# Altium PCB LUX_35.PcbDoc
Units mm, origin at the board's own origin, x right, y up, seen from the top; angles counter-clockwise.
Board outline 72.59 x 68.02 mm, 2 copper layers (Top, Bottom), stack 0.323 mm thick; 62 components, 57 nets, 203 pads, 77 vias.
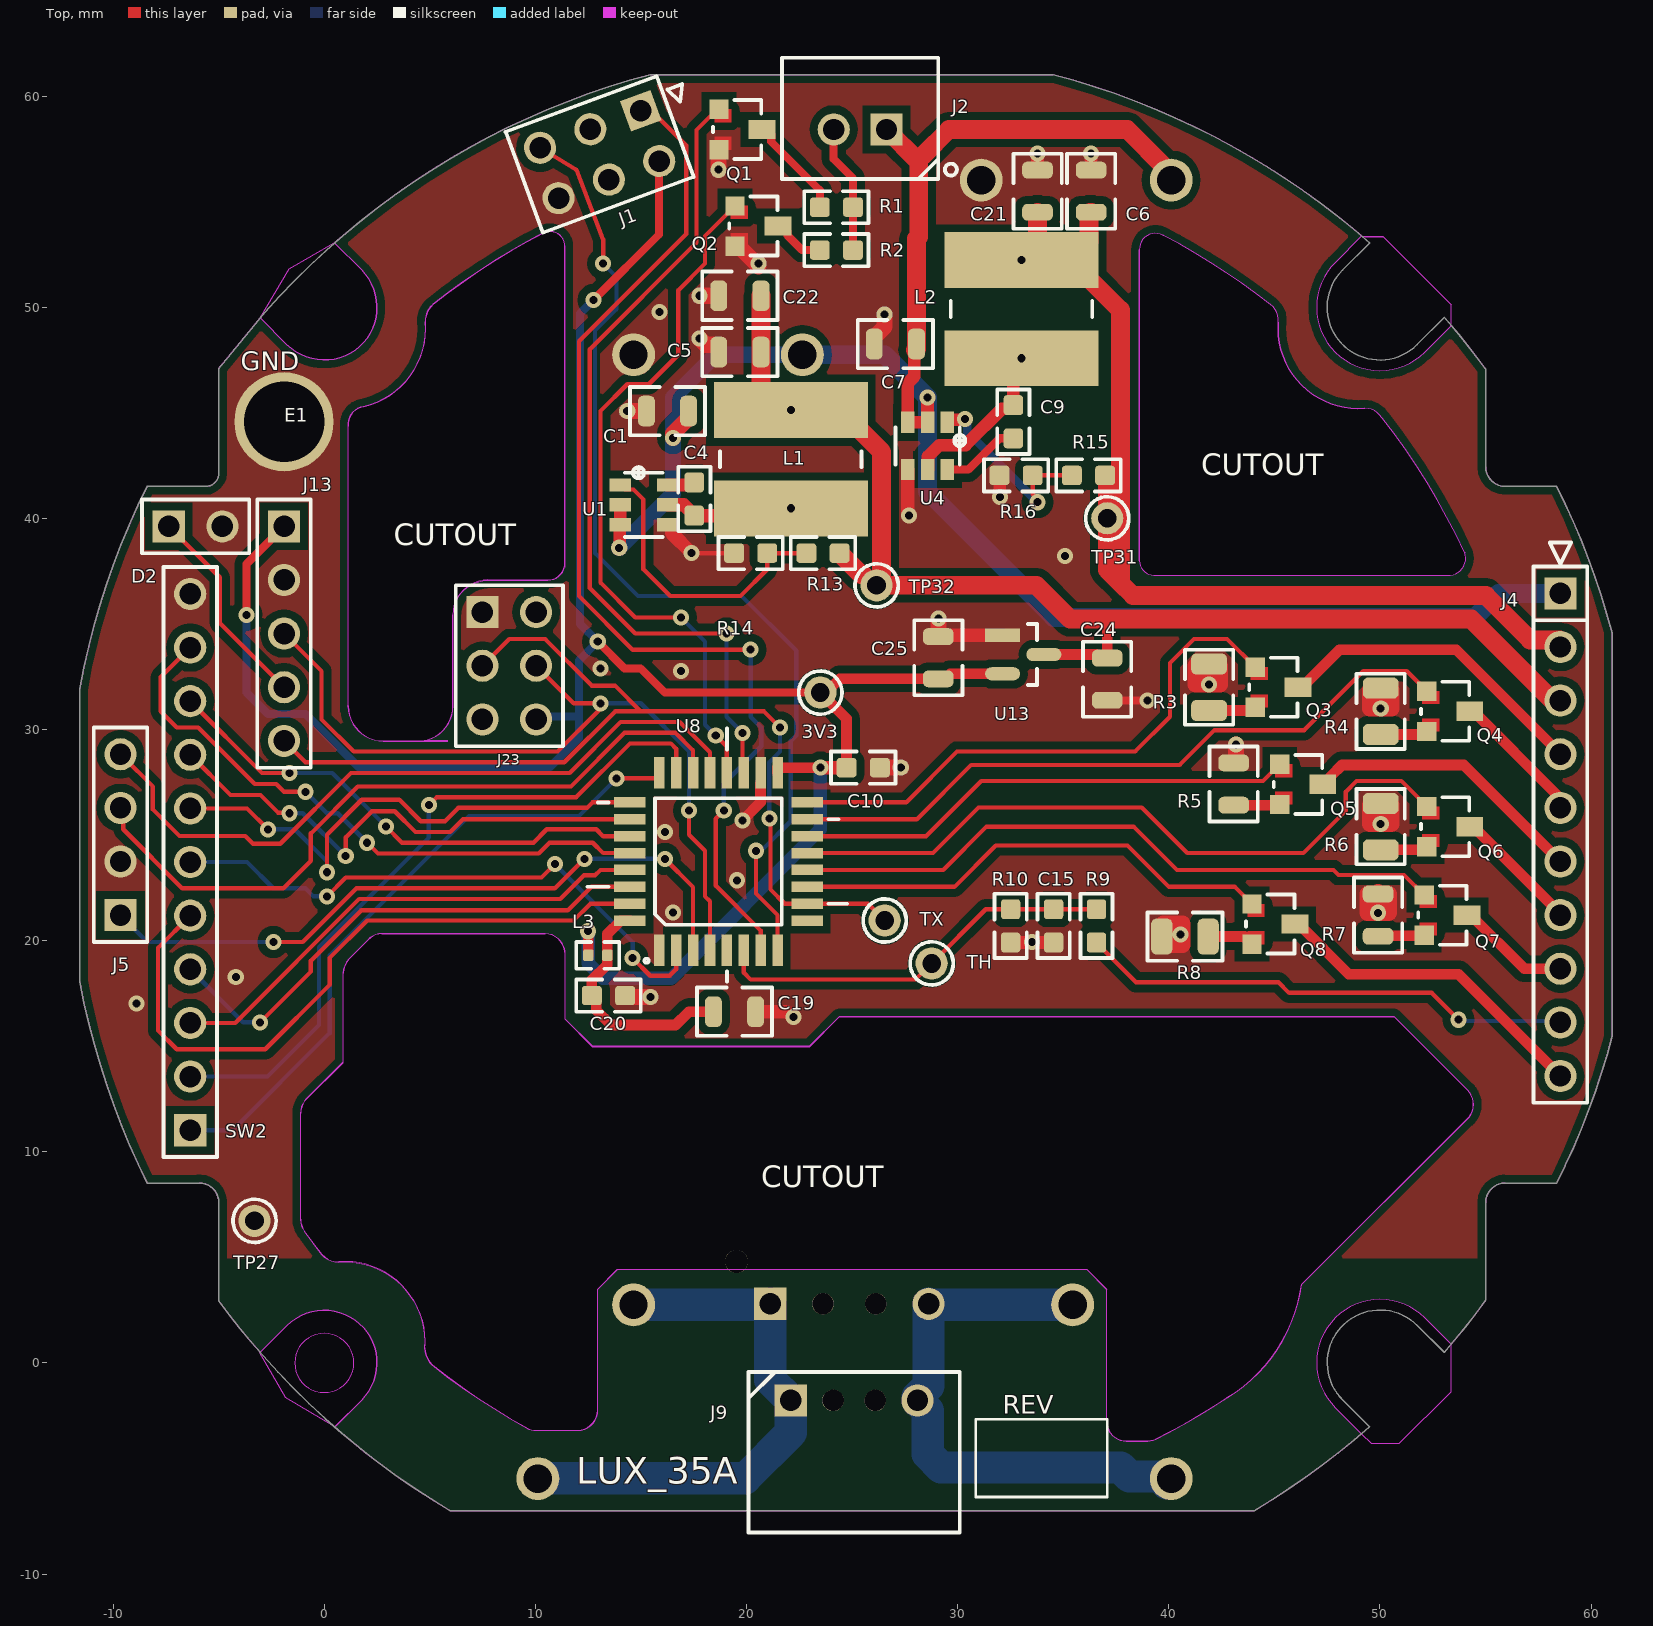
[diagram p0: Top view]
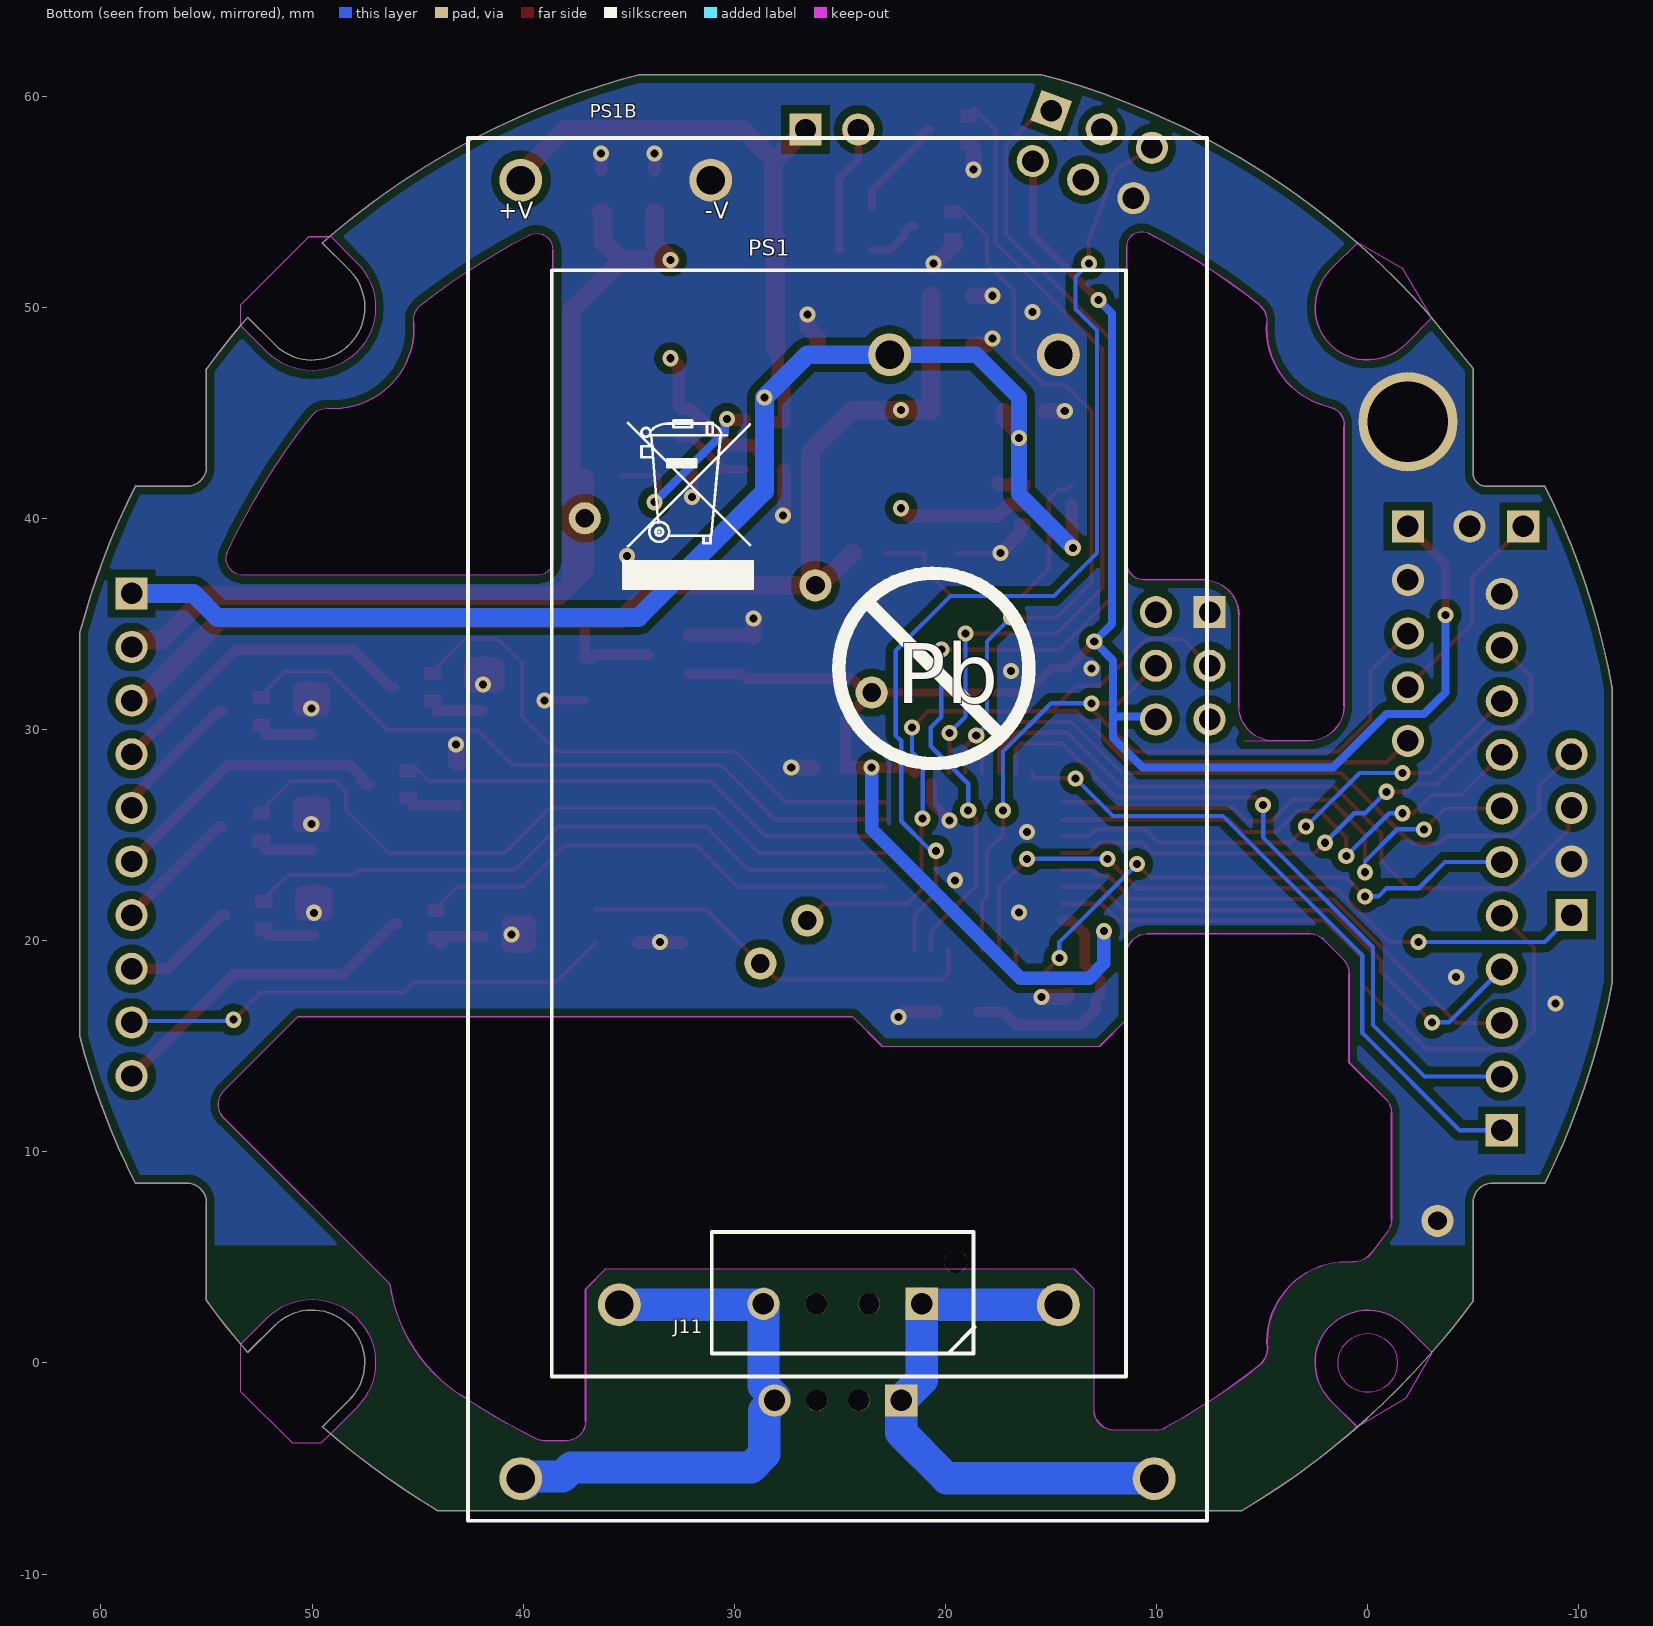
[diagram p1: Bottom view, seen from below]

## Layer stack, top to bottom
Solder Mask Top: solder mask 0.0102, Solder Resist, Dk 3.5
Top: signal copper 0.0343
Dielectric 1: dielectric 0.254, FR-4, Dk 4.3
Bottom: signal copper 0.0343
Solder Mask Bottom: solder mask 0.0102, Solder Resist, Dk 3.5

## Board outline
-11.58,18.052 -11.582,31.931 -11.583,31.927 cw(c23.315,25.648) -8.395,41.516 -5.626,41.516 -5.627,41.516 ccw(c-5.629,42.154) -4.991,42.151 -4.991,47.104 -2.816,49.759 cw(c24.918,25.226) 15.456,61.023 34.506,61.023 34.529,61.017 cw(c25.038,25.08) 49.519,53.049 48.233,51.763 ccw(c49.998,49.998) 51.763,48.233 53.05,49.519 53.055,49.514 cw(c25.608,25.551) 55.004,47.079 55.004,42.456 55.004,42.457 ccw(c55.953,42.465) 55.944,41.516 58.382,41.516 58.382,41.515 cw(c25.863,25.287) 60.998,34.582 60.998,15.456 61.006,15.485 cw(c26.008,24.697) 58.382,8.522 55.944,8.522 ccw(c55.945,7.58) 55.004,7.582 55.004,2.959 55.018,2.98 cw(c29.15,21.572) 53.043,0.501 51.768,1.775 ccw(c50.003,0.01) 48.238,-1.756 49.508,-3.026 49.498,-3.036 cw(c24.8,25.168) 44.056,-6.998 5.956,-6.998 5.938,-6.987 cw(c24.703,24.623) -2.9,0.345 cw(c19.375,20.483) -4.991,2.934 -4.991,7.582 -4.991,7.581 ccw(c-5.924,7.589) -5.931,8.522 -8.395,8.522 -8.385,8.502 cw(c24.43,24.791)
cut-out: -0.133,5.14 ccw(c0.707,5.914) 0.692,4.772 0.695,4.772 cw(c0.99,1.016) 4.758,1.016 cw(c0.99,1.016) 4.747,0.721 4.747,0.718 ccw(c5.922,0.744) 5.097,-0.094 5.101,-0.098 ccw(c25.18,25.235) 9.557,-3.065 9.578,-3.076 ccw(c10.001,-2.385) 10.038,-3.194 12.008,-3.194 ccw(c12,-2.233) 12.961,-2.242 12.961,3.493 13.893,4.426 36.107,4.426 37.039,3.493 37.039,-2.75 ccw(c37.992,-2.75) 37.992,-3.702 38.99,-3.702 38.993,-3.702 ccw(c38.94,-2.537) 39.383,-3.616 39.42,-3.6 ccw(c25.49,24.143) 42.76,-1.654 42.769,-1.648 ccw(c38.922,4.728) 46.3,3.719 54.11,11.529 54.126,11.531 ccw(c53.485,12.239) 54.441,12.239 ccw(c53.485,12.239) 54.163,12.913 50.676,16.398 50.667,16.402 24.39,16.402 24.381,16.398 22.982,14.999 12.705,14.999 11.418,16.287 11.418,19.355 11.418,19.36 ccw(c10.444,19.36) 10.465,20.333 2.726,20.333 ccw(c2.719,19.451) 2.052,20.028 2.052,20.029 1.155,19.131 1.154,19.13 ccw(c2.007,18.384) 0.876,18.459 0.876,18.458 0.876,14.229 -0.856,12.505 -0.857,12.504 ccw(c-0.162,11.82) -1.137,11.83 -1.137,11.829 -1.137,6.795 -1.137,6.793 ccw(c0.024,6.862) -0.959,6.24 -0.957,6.237 ccw(c23.626,23.836)
cut-out: 49.125,-3.356 49.58,-3.81 50.927,-3.81 53.373,-1.364 53.373,0.882 52.124,2.131 ccw(c50.003,0.01) 47.882,-2.112
cut-out: 47.877,52.119 ccw(c49.998,49.998) 52.119,47.877 53.379,49.136 53.379,49.137 53.379,50.126 50.165,53.34 49.176,53.34 49.135,53.38 49.138,53.38
cut-out: 1.765,-1.765 0.495,-3.023 -1.816,-1.651 -3.046,0.484 -1.765,1.765 cw(c0,0)
cut-out: -1.765,48.235 -3.023,49.505 -1.651,51.816 0.484,53.046 1.765,51.765 cw(c0,50)
cut-out: -1.4,0 ccw(c0,0) 0,-1.4 ccw(c0,0) 1.4,0 ccw(c0,0) 0,1.4 ccw(c0,0)
cut-out: 2.787,29.451 ccw(c2.787,29.456) 2.787,29.451 ccw(c2.787,29.477) 2.788,29.451 ccw(c2.788,29.461) 2.788,29.451 5.842,29.451 ccw(c5.842,29.464) 5.855,29.464 ccw(c5.842,29.464) 5.842,29.477 4.731,29.477 ccw(c4.436,31.124) 6.109,31.115 ccw(c6.109,31.115) 6.109,31.115 6.109,35.433 cw(c7.756,35.424) 7.726,37.071 10.592,37.071 ccw(c10.589,37.893) 11.39,37.709 ccw(c11.398,37.719) 11.411,37.719 11.411,52.876 cw(c11.41,52.876) 11.411,52.876 ccw(c10.696,52.876) 10.385,53.521 ccw(c10.388,53.509) 10.383,53.52 ccw(c25.182,24.846) 5.139,50.134 ccw(c5.147,50.124) 5.136,50.13 ccw(c5.14,50.118) 5.131,50.128 ccw(c5.846,49.328) 4.773,49.305 ccw(c4.786,49.305) 4.774,49.303 ccw(c4.786,49.302) 4.774,49.301 cw(c0.989,48.996) 4.786,48.996 cw(c0.98,48.996) 1.858,45.293 ccw(c1.959,44.458) 1.124,44.365 ccw(c1.125,44.364) 1.124,44.364 1.124,44.365 1.124,31.115 ccw(c1.136,31.115) 1.124,31.114 cw(c1.149,31.115) 1.124,31.115 1.124,31.114 ccw(c2.797,31.124)
cut-out: 38.602,37.999 ccw(c39.296,38.007) 39.293,37.313 53.33,37.313 ccw(c53.26,38.111) 54.009,38.399 54.018,38.379 ccw(c23.94,24.29) 50.101,44.754 50.093,44.764 ccw(c49.28,44.254) 49.28,45.214 49.283,45.214 cw(c48.978,49.003) 45.188,49.302 45.189,49.304 ccw(c44.301,49.398) 44.831,50.117 44.84,50.11 ccw(c24.591,24.378) 39.724,53.415 39.726,53.414 ccw(c39.371,52.731) 38.602,52.731

## Design rules (kind name [scope] priority, off if disabled: settings)
Clearance Clearance_1 [All vs InPolygon] p1: gap=0.381 ignorepadtopadclearanceinfootprint=FALSE
Clearance [All] p2: gap=0.203 ignorepadtopadclearanceinfootprint=FALSE
ComponentClearance [All] p1: gap=0 collisioncheckmode=3 verticalgap=0 showdistances=FALSE
FanoutControl Fanout_LCC [IsLCC] p1: bgadir=Out bgaviamode=Centered fanoutstyle=Auto fanoutdirection=Alternating viagrid=0.025 // Fanout_LCC (Default Rule)
FanoutControl Fanout_BGA [IsBGA] p2: bgadir=Out bgaviamode=Centered fanoutstyle=Auto fanoutdirection=Alternating viagrid=0.025 // Fanout_BGA (Default Rule)
FanoutControl Fanout_Small [(CompPinCount < 5)] p3: bgadir=Out bgaviamode=Centered fanoutstyle=Auto fanoutdirection=OutThenIn viagrid=0.025 // Fanout_Small (Default Rule)
FanoutControl Fanout_SOIC [IsSOIC] p4: bgadir=Out bgaviamode=Centered fanoutstyle=Auto fanoutdirection=Alternating viagrid=0.025 // Fanout_SOIC (Default Rule)
HoleSize [All] p1: absolutevalues=TRUE maxlimit=5.08 minlimit=0.025 maxpercent=80.000 minpercent=20.000
HoleToHoleClearance [All] p1: gap=0 allowstackedmicrovias=TRUE
MinimumSolderMaskSliver [All] p1: minsoldermaskwidth=0
PolygonConnect [All] p1: connectstyle=Direct reliefconductorwidth=0.254 reliefentries=4 polygonreliefangle="90 Angle" airgapwidth=0.254
RoutingVias [All] p1: holewidth=0.381 width=0.762 viastyle="Through Hole" minholewidth=0.381 minwidth=0.762 maxholewidth=0.711 maxwidth=1.27
SilkToSilkClearance [All] p1: silktosilkclearance=0
SilkToSolderMaskClearance [IsPad] p1: minsilkscreentomaskgap=0 clearancetoexposedcopper=TRUE
SolderMaskExpansion [All] p1: expansion=0.102 istentingtop=FALSE
Width [All] p1: maxlimit=2.54 minlimit=0.127 preferedwidth=0.203
20 further rules are at their usual default settings.

## Classes and differential pairs
component class PAGE3-LED_Drivers: J4 Q3 Q4 Q5 Q6 Q7 Q8 Q12 R3 R4 R5 R6 R7 R8 R19 R20 R21 R26
component class PAGE2-CPU: 3V3 C10 C15 C19 C20 C24 C25 D2 J1 J2 J5 J6 J13 J23 L3 Q1 Q2 R1 R2 R9 R10 SW2 TH TP27 TX U8 U13
component class PAGE1-Power: C1 C4 C5 C6 C7 C9 C21 C22 E1 J9 J11 L1 L2 PS1 PS1B R13 R14 R15 R16 TP31 TP32 U1 U4

## Components (designator, comment, footprint, x,y, rotation, side; value= is the part's Value field where it differs from the comment)
3V3 "TP HOLE" 0.035 23.495,31.75 r0 top
C1 "10uF" _0805 16.256,45.085 r180 top
C4 "1uF" _0603 17.526,40.919 r270 top
C5 "22uF" _0805 19.685,47.879 r180 top
C6 "22uF" _0805 36.322,55.499 r90 top
C7 "10uF" _0805 27.051,48.26 r180 top
C9 "1uF" _0603 32.639,44.577 r90 top
C10 "0.1uF" _0603 25.527,28.194 r0 top
C15 "0.1uF" _0603 34.544,20.701 r270 top
C19 "10uF" _0805 19.431,16.637 r0 top
C20 "0.1uF" _0603 13.462,17.399 r0 top
C21 "22uF" _0805 33.782,55.499 r90 top
C22 "22uF" _0805 19.685,50.546 r180 top
C24 "10uF" _0805 37.084,32.385 r270 top
C25 "10uF" _0805 29.083,33.401 r90 top
D2 "Yellow LED" SIP-2P -7.366,39.624 r0 top
E1 "Mounting Hole" HOLE128AA -1.905,44.577 r0 top
J1 "CON6AP" 2X3 14.986,59.309 r200.22 top
J2 "B2B-XH-A" JST1X2 25.38,58.42 r0 top
J4 "HEADER 10" SIP-10 58.547,36.449 r270 top
J5 "CON4AP" SIP-4PA -9.652,21.209 r90 top
J9 "B4B-PH-K" JST1X4-2AA 22.098,-1.778 r180 top
J11 "B4B-XH-A" JST1X4-2 21.122,2.8 r180 bottom
J13 "SIP" SIP-5P -1.905,39.624 r270 top
J23 "CONN SOCKET 3x2" 2X3 7.493,35.56 r270 top
L1 "4.7uH" IND.6.7MM 22.098,42.799 r270 top
L2 "4.7uH" IND.6.7MM 33.02,49.911 r270 top
L3 "FERRITE BEAD" _0402 12.954,19.304 r180 top
PS1 "IRM-20-12" THRUHOLEPS 14.648,2.752 r90 bottom locked
PS1B "MFM-30-12" "THRUHOLEPS - duplicate" 40.115,-5.477 r180 bottom locked
Q1 "FDN327N" SOT23-323 19.685,58.42 r270 top
Q2 "FDN327N" SOT23-323 20.447,53.848 r270 top
Q3 "FDN327N" SOT23-323 45.085,32.004 r270 top
Q4 "FDN327N" SOT23-323 53.213,30.861 r270 top
Q5 "FDN327N" SOT23-323 46.247,27.401 r270 top
Q6 "FDN327N" SOT23-323 53.213,25.4 r270 top
Q7 "FDN327N" SOT23-323 53.086,21.209 r270 top
Q8 "FDN327N" SOT23-323 44.933,20.785 r270 top
R1 "120 OHM" _0603 24.257,52.705 r0 top
R2 "180 OHM" _0603 24.257,54.737 r0 top
R3 "0.2 OHM" _0805A 41.91,32.004 r270 top
R4 "0.2 OHM" _0805A 50.038,30.861 r270 top
R5 "0.33 OHM" _0805 43.072,27.417 r270 top
R6 "0.2 OHM" _0805A 50.038,25.4 r270 top
R7 "0.33 OHM" _0805 49.911,21.209 r270 top
R8 "0.24 OHM" _0805A 40.767,20.193 r0 top
R9 "1.24K" _0603 36.576,20.701 r90 top
R10 "330 OHM" _0603 32.512,20.701 r270 top
R13 "57.6K" _0603 23.622,38.354 r180 top
R14 "8.06K" _0603 20.193,38.354 r180 top
R15 "22K" _0603 36.195,42.037 r180 top
R16 "976" _0603 32.766,42.037 r180 top
SW2 "SIP" SIP-11PA -6.35,11.024 r90 top
TH "TP HOLE" 0.035 28.769,18.923 r0 top
TP27 "TP HOLE" 0.035 -3.302,6.731 r0 top
TP31 "TP HOLE" 0.035 37.084,40.005 r0 top
TP32 "TP HOLE" 0.035 26.162,36.83 r0 top
TX "TP HOLE" 0.035 26.543,20.955 r0 top
U1 "AP63300" TSOT2-6 15.138,40.64 r270 top
U4 "AP63300" TSOT2-6 28.575,43.434 r180 top
U8 "Xmega16E5" TQFP-32 18.669,23.749 r90 top
U13 "AP2210N-3.3TRG1" FP-SOT23-IPC_A 33.108,33.554 r0 top

## Footprints (in the part's own frame and the unit in brackets; to place one, negate y for a bottom-side part, rotate by r counter-clockwise, add the part's x,y. Pads: shape width x height; smd on the part's side, far side on the other; paste and mask are expansions set on the pad)
0.035 [mil]
  round 60 hole 35: 1(0,0)
  silkscreen extent -40,-40 40,40
2X3 [mil]
  rect 60x60 / inner round 60 / far side rect 60x60 hole 40: 1(0,0)
  round 60 hole 40: 2(0,100) 3(100,0) 4(100,100) 5(200,0) 6(200,100)
  silkscreen extent -90,-50 250,150
_0402 [mm]
  rrect40% 0.5x0.55 smd: 1(-0.45,0) 2(0.45,0)
  silkscreen extent -1.02,-0.64 1.02,0.64
_0603 [mil]
  rrect31% 37x36 smd: 1(-31,0) 2(31,0)
  silkscreen extent -60,-30 60,30
_0805 [mm]
  rrect62% 0.8x1.45 smd: 1(-1,0) 2(1,0)
  silkscreen extent -1.78,-1.14 1.78,1.14
_0805A [mm]
  rrect50% 1x1.7 smd: 1(-1.1,0) 2(1.1,0)
  silkscreen extent -1.78,-1.14 1.78,1.14
FP-SOT23-IPC_A [mm]
  rect 1.659x0.627 smd paste+0 mask+0: 1(-0.977,0.915)
  rrect100% 1.659x0.627 smd paste+0 mask+0: 2(-0.977,-0.915) 3(0.977,0)
  silkscreen extent 0.23,-1.45 0.65,1.45
HOLE128AA [mil]
  round 185 / inner round 150 / far side round 185 hole 150: 1(0,0)
IND.6.7MM [mm]
  rect 2.65x7.3 smd: 1(-2.325,0) 2(2.325,0)
  silkscreen extent -0.38,-3.35 0.38,3.35
JST1X2 [mil]
  rect 60x60 / inner round 55.12 / far side rect 60x60 hole 40: 1(49.21,0)
  round 60 / inner round 55.12 / far side round 60 hole 40: 2(-49.21,0)
  silkscreen extent -146,-93 180,134
JST1X4-2 [mil]
  rect 60x60 / inner round 55.12 / far side rect 60x60 hole 40: 1(0,0)
  round 40 / inner round 55.12 / far side round 40 hole 40 unplated: 2(-196.85,0) 3(-98.43,0)
  round 60 / inner round 55.12 / far side round 60 hole 40: 4(-295.28,0)
  round 43 / inner round 43.31 / far side round 43 hole 43 unplated: 5(62.99,78.74)
  silkscreen extent -392,-93 98,134
JST1X4-2AA [mil]
  rect 60x60 / inner round 55.12 / far side rect 60x60 hole 40: 1(0,0)
  round 40 / inner round 55.12 / far side round 40 hole 40 unplated: 2(-157.48,0) 3(-78.74,0)
  round 60 / inner round 55.12 / far side round 60 hole 40: 4(-236.22,0)
  silkscreen extent -315,-53 79,246
SIP-2P [mil]
  rect 60x60 / inner round 60 / far side rect 60x60 hole 40: 1(0,0)
  round 60 / inner round 60 / far side rrect100% 60x60 hole 40: 2(100,0)
  silkscreen extent -50,-50 150,50
SIP-4PA [mil]
  rect 60x60 / inner round 60 / far side rect 60x60 hole 40: 1(0,0)
  round 60 hole 40: 2(100,0) 3(200,0) 4(300,0)
  silkscreen extent -50,-50 350,50
SIP-5P [mil]
  rect 60x60 / inner round 60 / far side rect 60x60 hole 40: 1(0,0)
  round 60 hole 40: 2(100,0) 3(200,0) 4(300,0) 5(400,0)
  silkscreen extent -50,-50 450,50
SIP-10 [mil]
  rect 60x60 / inner round 60 / far side rect 60x60 hole 40: 1(0,0)
  round 60 hole 40: 2(100,0) 3(200,0) 4(300,0) 5(400,0) 6(500,0) 7(600,0) 8(700,0) 9(800,0) 10(900,0)
  silkscreen extent -95,-50 950,50
SIP-11PA [mil]
  rect 60x60 / inner round 60 / far side rect 60x60 hole 40: 1(0,0)
  round 60 hole 40: 2(100,0) 3(200,0) 4(300,0) 5(400,0) 6(500,0) 7(600,0) 8(700,0) 9(800,0) 10(900,0) 11(1000,0)
  silkscreen extent -50,-50 1050,50
SOT23-323 [mil]
  rect 36x36 smd: 1(-37.5,-39) 2(37.5,-39)
  rect 36x50 smd: 3(0,41)
  Top region: -13.78,-47.24 -37.4,-47.24 -37.4,-15.75 -13.78,-15.75 -13.78,-47.24
  Top region: 13.78,-47.24 37.4,-47.24 37.4,-15.75 13.78,-15.75 13.78,-47.24
  silkscreen extent -55,-50 55,40
THRUHOLEPS [mil]
  round 80 hole 53: +VO(1771.65,314.96) -VO(1771.65,0) ACL(0,0) ACN(0,818.9)
  silkscreen extent -134,-126 1929,945
"THRUHOLEPS - duplicate" [mil]
  round 80 hole 53: +VO(0,2421.26) -VO(354.33,2421.26) ACL(0,0) ASN(1181.1,0)
  silkscreen extent -98,-79 1280,2500
TQFP-32 [mm]
  rect 1.5x0.5 smd: 1(-4.2,2.8) 2(-4.2,2) 3(-4.2,1.2) 4(-4.2,0.4) 5(-4.2,-0.4) 6(-4.2,-1.2) 7(-4.2,-2) 8(-4.2,-2.8) 17(4.2,-2.8) 18(4.2,-2) 19(4.2,-1.2) 20(4.2,-0.4) 21(4.2,0.4) 22(4.2,1.2) 23(4.2,2) 24(4.2,2.8)
  rect 0.5x1.5 smd: 9(-2.8,-4.2) 10(-2,-4.2) 11(-1.2,-4.2) 12(-0.4,-4.2) 13(0.4,-4.2) 14(1.2,-4.2) 15(2,-4.2) 16(2.8,-4.2) 25(2.8,4.2) 26(2,4.2) 27(1.2,4.2) 28(0.4,4.2) 29(-0.4,4.2) 30(-1.2,4.2) 31(-2,4.2) 32(-2.8,4.2)
  silkscreen extent -5.7,-6.1 6.3,6.2
TSOT2-6 [mil]
  rect 25x40 smd: 1(-37,-44) 2(0,-44) 3(37,-44) 4(37,44) 5(0,44) 6(-37,44)
  silkscreen extent -70,-35 60,35

## Part data
3V3 TH TP27 TP31 TP32 TX: library part "TEST POINT_1", Color=Default, DataSheet=Yes, EDIForiginalOrigin="(pt 0 0)", EDIFviewName=NORMAL, Graphic="TEST POINT", Implementation Type=<none>, Name=I16753259, Notes="0.060 Pad", OrCADviewType=LIBRARY_PART, PCB Footprint=0.035, Pin Names Visible=True, Pin Numbers Visible=False
C1 C5 C6 C7 C19 C21 C22 C24 C25: library part "CAPACITOR POL/SM", Voltage=16V, Mfg=Samsung, PCB Footprint=_0805
  C1 C5 C6 C7 C21 C22: P/N=CL21A226KOQNNNE, Precision="10% X5R"
  C19 C24 C25: P/N=CL21B106KOQNNNE, Precision="10% X7R"
C4 C9 C10 C15 C20: library part "CAPACITOR NON-POL", Color=Default, Voltage=16V, DataSheet=Yes, EDIForiginalOrigin="(pt 0 0)", EDIFviewName=NORMAL, Graphic="CAPACITOR NON-POL", Implementation Type=<none>, PCB Footprint=_0603, Pin Names Visible=False, Pin Numbers Visible=False
  C4 C9: Mfg=Samsung, Name=I16777427, P/N=CL10A105KO8NNNC, Precision="X5R 10%"
  C10 C20: Mfg=AVX, Name=I16777427, P/N=0603YC104KAT2A, Precision="10% X7R"
  C15: Mfg=AVX, Name=I16777291, P/N=0603YC104KAT2A, Precision="10% X7R"
D2: library part LED, Mfg=LiteOn, P/N=LTL-4232N, PCB Footprint="T1 3mm thru hole"
E1: library part hole_0, EDIForiginalOrigin="(pt 0 10)", EDIFviewName=NORMAL, Name=hole.Normal, OrCADviewType=LIBRARY_PART, PCB Footprint=MountingHole, Pin Names Visible=False, Pin Numbers Visible=False
J1: library part CON8AP_0, Mfg=Harwin, P/N=M20-9980446, PCB Footprint=2x4
J2: library part CON2, Color=Default, EDIForiginalOrigin="(pt 0 0)", EDIFviewName=NORMAL, Graphic=CON2.Normal, Implementation Type=<none>, Mfg=JST, P/N=B2B-XH-A(LF)(SN), PCB Footprint=SIP-02, Pin Names Visible=True, Pin Numbers Visible=True
J5: library part CON4AP_5, PCB Footprint="HEADER 1x4 0.1\""
J9 J11: library part CON4_8, DataSheet=Yes, Mfg=JST, PCB Footprint=SIP-4
  J9: P/N=B4B-PH-K-S(LF)(SN)
  J11: P/N=B4B-XH-A(LF)(SN)
J13: library part CON4_9, DataSheet=Yes, Mfg=TBD, P/N="2.54mm SIP PINS", PCB Footprint=SIP-4
J23: library part "CONN SOCKET 6x2_0"
L1 L2: library part "INDUCTOR FERRITE/SM", Power=1A, Mfg=Bourns, P/N=SRN4018-4R7M
  L1: PCB Footprint=5x5mm
  L2: PCB Footprint=6x6mm
L3: library part "INDUCTOR FERRITE/SM", Mfg=MuRata, P/N=BLM15BB221SN1D, PCB Footprint=_0402
PS1: library part VOFM-5-5, Color=Default, Power=20W, Voltage=12V, DataSheet=Yes, EDIForiginalOrigin="(pt 0 0)", EDIFviewName=NORMAL, Graphic=VOFM-5-5.Normal, Implementation Type=<none>, Mfg="Mean Well", P/N=IRM-20-12, PCB Footprint=ThruHolePS, Pin Names Visible=True, Pin Numbers Visible=True
PS1B: library part VOFM-5-5_5, Color=Default, Power=30W, Voltage=12V, DataSheet=Yes, EDIForiginalOrigin="(pt 0 0)", EDIFviewName=NORMAL, Graphic=VOFM-5-5.Normal, Implementation Type=<none>, Mfg="Mean Well", P/N=IRM-30-12, PCB Footprint=ThruHolePS, Pin Names Visible=True, Pin Numbers Visible=True
Q1 Q2 Q3 Q4 Q5 Q6 Q7 Q8: library part "N DGS_0", Power=2A, Voltage=20V, Mfg=Fairchild, P/N=FDN327N, PCB Footprint=SOT23-3
R1 R2: library part RESISTOR/SM, Power=0.25W, Voltage=50V, Mfg=Rohm, PCB Footprint=_0603, Precision=5%
  R1: P/N=ESR03EZPJ121
  R2: P/N=ESR03EZPJ181
R3 R4 R5 R6 R7: library part RESISTOR, Power=0.50W, Voltage=?V, Mfg=Panasonic, P/N=ERJ-6DSFR20V, Precision=1%
  R3 R5 R6 R7: PCB Footprint=0805
  R4: PCB Footprint=1210
R8: library part RESISTOR, Power=0.33W, Voltage=?V, Mfg=Susumu, P/N=RL1220S-R24-F, PCB Footprint=0805, Precision=1%
R9: library part RESISTOR/SM, Power=0.10W, Voltage=75V, Mfg=Vishay, P/N=CRCW06031K24FKEB, PCB Footprint=_0603, Precision=1%
R10: library part RESISTOR/SM, Power=0.10W, Voltage=50V, Mfg=Stackpole, P/N=RMCF0603FT330R, PCB Footprint=_0603, Precision=1%
R13 R14 R15 R16: library part RESISTOR, Power=0.10W, Voltage=75V, Mfg=Vishay, PCB Footprint=_0603, Precision=5%
  R13: P/N=541-57.6KHCT-ND
  R14: P/N=541-8.06KHCT-ND
  R15: P/N=541-22.0KHCT-ND
  R16: P/N=541-976HCT-ND
SW2: library part CON4_10, DataSheet=Yes, Mfg=TBD, P/N="2mm SIP PINS", PCB Footprint=SIP-4
U1 U4: library part NCP3170_0_2, Mfg="Diodes Inc.", P/N=AP63300, PCB Footprint=SOIC-8
U8: library part Xmega8E5, Mfg=Atmel, P/N=ATxmega16E5, PCB Footprint=TQFP-32
U13: library part AP2210N-3P3TRG1, Built_By=EMAMatt, Copyright="Copyright (C) 2018 Accelerated Designs. All rights reserved", Manufacturer_Part_Number=AP2210N-3.3TRG1, PCB Footprint=SOT_3P3TRG1_DIO, SourceLibrary=DiodesInc2019-12-05, Vendor="Diodes Inc"
J4: Mfg=Samtec, P/N=ESW-110-44-T-S, PCB Footprint=SIP-10

## Via types
v1: diameter 0.762, hole 0.381, Top to Bottom, 74 vias
v2: diameter 0.762, hole 0.381, Top to Bottom, tented both sides, 3 vias

## Nets (pads, with @x,y where several pads share a name; then routed paths per layer and width w, separated by ;. In a path a pad name is that pad's centre, name@x,y a point inside that pad or via, vN(x,y) a via of type N, cw(c..) or ccw(c..) an arc to the next point about the centre after c; other vN are vias at no path point)
+3V3: 3V3.1 C10.1 C25.1 J1.2 J13.1 J23.6 L3.2 U8.17 U13.2 | length 106
  Top w0.381: v1(-3.683,35.433) -3.683,37.846 J13.1 ; v1(12.751,50.343) 15.864,53.456 J1.2 ; v1(12.954,34.163) 14.224,32.893 14.986,32.893 16.129,31.75 3V3.1
  Top w0.5: 3V3.1 23.772,31.75 24.423,32.401 C25.1 29.408,32.401 29.646,32.639 U13.2
  Top w0.508: v1(12.497,20.447) 12.504,20.396 L3.2 ; U8.17 21.469,28.194 v1(23.495,28.194) ; 3V3.1 24.74,30.505 C10.1
  Top w0.635: v1(23.495,28.194) C10.1
  Bottom w0.381: v1(-3.683,35.433) -3.683,31.75 -2.667,30.734 -0.889,30.734 1.651,28.194 10.668,28.194 12.065,29.591 12.065,30.607 ; J23.6 10.16,30.607 12.065,30.607 ; v1(12.751,50.343) 12.116,49.708 12.116,35.001 v1(12.954,34.163) 12.065,33.274 12.065,30.607
  Bottom w0.635: v1(12.497,20.447) 12.497,18.923 13.195,18.224 16.447,18.224 23.495,25.273 v1(23.495,28.194)
+6V5: C5.1 C22.1 C24.1 J4.3 L1.1 R13.1 TP32.1 U13.3 | length 59.5
  Top w0.508: U13.3 36.59,33.554 36.759,33.385 C24.1 37.084,35.103 37.211,35.23
  Top w0.889: C22.1 20.685,45.13 v1(22.098,45.13) ; L1.1 24.423,45.124 26.396,43.151 26.396,37.236 26.162,37.002 TP32.1 33.73,36.83 35.331,35.23 37.211,35.23 54.331,35.23 58.191,31.369 J4.3 ; R13.1 24.422,38.354 25.438,37.338 25.527,37.338
+7V5: C6.1 C21.1 J4.2 L2.1 R15.1 TP31.1 | length 51
  Top w0.889: C21.1 33.782,52.998 v1(33.02,52.236) L2.1@35.345,52.236 ; C6.1 36.27,54.499 36.226,54.455 36.226,53.117 L2.1@35.345,52.236 ; R15.1@37.084,41.91 TP31.1 37.084,37.567 37.713,36.937 ; J4.2@58.522,34.239 57.112,34.239 55.018,36.347 38.303,36.347 37.713,36.937 ; L2.1@35.345,52.236 37.713,49.868 37.713,36.937
+12V: C1.1 C7.1 J2.1 J4.1 PS1.+VO PS1B.+VO U1.2 U1.3 U4.2 U4.3 | length 92.4
  Top w0.508: v1@16.51,43.799 v1(16.51,43.815)
  Top w0.6: v2(13.97,38.608) 13.995,38.633 13.995,39.683 14.013,39.7 U1.3 U1.2 ; C7.1@28.007,47.979 27.951,47.924 27.951,46.733 27.635,46.417 U4.3 U4.2 v1(28.575,45.72)
  Top w0.762: v1(16.51,43.815) 16.51,44.014 17.256,44.76 C1.1
  Top w0.889: J2.1 28.154,56.896 28.154,53.343 ; C7.1@28.007,47.979 28.051,48.024 C7.1 28.051,53.24 ; 28.378,57.207 29.591,58.42 38.033,58.42 PS1B.+VO@39.906,56.547
  Bottom w0.762: v2(13.97,38.608) 16.51,41.148 v1(16.51,43.815) 16.51,45.72 18.542,47.752 PS1.+VO
  Bottom w0.889: PS1.+VO 26.543,47.752 v1(28.575,45.72) 28.575,41.275 34.544,35.306 54.483,35.306 55.626,36.449 J4.1
_UNPAIR: J13.3 J23.4 U8.4 | length 38.5
  Top w0.203: J13.3 -0.127,32.766 -0.127,30.48 1.397,28.956 11.049,28.956 12.974,30.881 12.974,31.135 v1(13.081,31.242) ; J23.4 11.811,31.242 v1@13.064,31.242 ; v1(17.272,26.162) 17.272,25.019 18.034,24.257 18.034,22.098 18.269,21.863 U8.4
  Bottom w0.203: v1(13.081,31.242) 14.986,31.242 17.272,28.956 v1(17.272,26.162)
AUX_RX: J5.3 U8.22 | length 34.4
  Top w0.203: J5.3 -9.525,26.162 -9.525,25.273 -6.731,22.479 -1.937,22.479 -0.635,23.781 -0.635,25.082 1.587,27.305 11.684,27.305 14.224,29.845 16.637,29.845 17.469,29.013 U8.22
DMX_TX: J13.5 J23.3 TX.1 U8.10 | length 49.1
  Top w0.203: J13.5@-1.651,29.464 J13.5 -0.889,28.448 11.366,28.448 13.779,30.861 14.986,30.861 ; J23.3 8.763,34.29 10.46,34.29 12.67,32.08 13.767,32.08 14.986,30.861 ; v1(21.082,25.781) 21.133,25.73 21.133,22.428 21.812,21.749 25.749,21.749 TX.1 ; v1(21.59,30.099) 20.828,30.861 14.986,30.861
  Bottom w0.203: J13.5@-2.083,29.286 J13.5 ; v1(21.082,25.781) 21.082,28.448 21.59,28.956 v1(21.59,30.099)
FAN_ENA: Q2.1 U8.20 | length 33.8
  Top w0.203: v1(16.891,35.306) 14.732,35.306 13.081,36.957 13.081,45.085 14.351,46.355 15.367,46.355 16.764,47.752 16.764,50.8 18.034,52.07 18.034,53.378 Q2.1 ; v1(18.542,29.718) 19.05,29.21 19.069,29.21 U8.20
  Bottom w0.203: v1(16.891,35.306) 18.034,34.163 18.034,30.226 v1(18.542,29.718)
FAN_FAST: Q1.1 U8.19 | length 39.6
  Top w0.203: Q1.1 18.605,59.372 17.628,58.395 17.628,53.061 12.573,48.006 12.573,36.703 14.732,34.544 v1(19.05,34.544) ; v1(19.812,29.845) 19.812,27.949 U8.19
  Bottom w0.203: v1(19.05,34.544) 19.05,30.607 v1(19.812,29.845)
GND_POWER.GLOBAL: C1.2 C5.2 C6.2 C7.2 C10.2 C15.2 C19.2 C20.2 C21.2 C22.2 C24.2 C25.2 D2.2 E1.1 J1.6 J5.2 J13.2 J23.1 PS1.-VO PS1B.-VO Q1.2 Q2.2 R3.1 R4.1 R5.1 R6.1 R7.1 R8.1 R10.2 R14.2 R16.2 SW2.11 TP27.1 U1.4 U4.4 U8.1 U8.18 U13.1 | length 54
  Top w0.203: v1(17.399,38.354) R14.2
  Top w0.381: C24.2 37.092,31.377 38.981,31.377 v1(38.989,31.369)
  Top w0.508: v1(19.818,25.691) 19.818,25.703 20.665,26.549 U8.18@20.665,27.453
  Top w0.61: R16.2 31.991,42.024 31.991,41.034 v1(32.004,41.021) ; C21.2@33.779,56.499 33.782,56.502 v1(33.782,57.277) ; C6.2 v1(36.322,57.277)
  Top w0.635: U1.4 16.447,39.7 16.447,39.306 v1(17.399,38.354) ; C19.2 21.937,16.637 22.191,16.383 v1(22.225,16.383) ; U4.4 27.635,40.217 27.686,40.166 v1(27.686,40.132) ; C25.2 29.147,34.465 32.127,34.465 U13.1 ; R10.2 v1@33.528,19.914 ; v1(33.528,19.939) v1@33.528,19.914 ; C15.2 v1@33.528,19.914
  Top w0.762: C20.2 14.326,17.323 v1(15.443,17.323) ; v1(14.351,45.085) C1.2 ; v1(17.78,48.514) 18.071,48.223 18.666,48.223 18.685,48.204 C5.2 ; v1(17.78,50.546) C22.2 ; v1(18.669,56.515) 18.669,57.468 Q1.2 ; Q2.2@19.533,52.984 20.574,51.943 v1(20.574,52.07) ; C7.2 26.051,48.585 26.543,49.077 v1(26.543,49.657) ; C10.2 v1(27.305,28.194) ; C25.2 v1(29.083,35.265) ; R8.1@39.751,19.787 40.64,19.787 v1@40.64,20.295 ; R8.1@39.751,20.295 v1(40.556,20.295) v1@40.64,20.295 ; R8.1@39.751,20.803 40.64,20.803 v1@40.64,20.295 ; 41.275,32.131 R3.1@41.275,33.02 ; 41.402,32.131 v1(41.91,32.131) ; R3.1@41.402,33.02 R3.1@41.91,33.02 ; R3.1 R3.1@41.91,33.02 ; R5.1 43.161,28.417 43.18,28.436 v1(43.18,29.286) ; R7.1@49.911,22.293 R7.1 ; R6.1 R6.1@50.038,26.416 ; R4.1 R4.1@50.038,31.877 ; v1(41.91,32.131) R3.1@41.91,33.02 ; v1(41.91,32.131) 42.418,32.131 42.418,33.02 R3.1@41.91,33.02 ; v1(49.911,21.32) 49.403,21.32 49.403,22.209 R7.1 ; v1(49.911,21.32) R7.1 ; v1(49.911,21.32) 50.419,21.32 50.419,22.209 R7.1 ; v1(50.038,25.527) 50.546,25.527 50.546,26.416 R6.1@50.038,26.416 ; v1(50.038,25.527) R6.1@50.038,26.416 ; v1(50.038,25.527) 49.53,25.527 49.53,26.416 R6.1@50.038,26.416 ; v1(50.038,30.988) 50.546,30.988 50.546,31.877 R4.1@50.038,31.877 ; v1(50.038,30.988) R4.1@50.038,31.877 ; v1(50.038,30.988) 49.53,30.988 49.53,31.877 R4.1@50.038,31.877
  other v1: -8.89,17.018 -4.191,18.288 16.51,21.336 19.558,22.86 16.129,25.146 16.891,32.766 13.081,32.893 35.077,38.227 15.875,49.784
N_RESET: J1.5 U8.8 | length 48.1
  Top w0.203: J1.5 11.938,56.515 13.208,53.213 v1(13.208,52.07) ; v1(20.447,24.257) 20.447,22.231 21.469,21.209 U8.8
  Bottom w0.203: v1(13.208,52.07) 13.843,51.435 13.843,49.911 12.827,48.895 12.827,38.354 14.859,36.322 19.766,36.322 22.352,33.736 22.352,29.718 22.098,29.464 22.098,25.654 20.808,24.364 20.554,24.364 v1(20.447,24.257)
NetC4_1: C4.1 U1.6 | length 1.3
  Top w0.635: U1.6 17.399,41.58 C4.1
NetC4_2: C4.2 L1.2 U1.5 | length 6.2
  Top w0.635: U1.5 17.018,40.64 17.374,40.284 17.386,40.284 17.526,40.145 C4.2 21.75,40.132 v1(22.098,40.48)
NetC9_1: C9.1 U4.6 | length 3.7
  Top w0.4: U4.6 30.505,42.316 31.979,43.79 C9.1
NetC9_2: C9.2 L2.2 U4.5 | length 8.1
  Top w0.6: U4.5 28.593,42.334 28.593,42.931 29.132,43.471 30.37,43.471 32.094,45.194 32.482,45.194 32.639,45.352 C9.2 32.639,47.205 v1(33.02,47.586)
NetC15_1: C15.1 R9.2 R10.1 TH.1 U8.6 | length 19.3
  Top w0.203: U8.6 19.869,18.485 20.193,18.161 28.007,18.161 TH.1 31.332,21.486 32.51,21.486 R10.1 C15.1 R9.2
NetC19_1: C19.1 C20.1 L3.1 U8.32 | length 11.4
  Top w0.508: U8.32 14.039,20.949 13.404,20.314 L3.1 13.404,18.865 12.675,18.136 C20.1 12.683,17.399 12.886,17.196 12.886,16.705 13.589,16.002 16.637,16.002 17.272,16.637 C19.1
NetJ1_1: J1.1 U8.7 | length 51.7
  Top w0.203: J1.1 15.494,59.309 17.145,57.658 17.145,53.467 12.065,48.387 12.065,36.322 14.605,33.782 v1(20.193,33.782) ; v1(18.923,26.162) 18.542,25.781 18.542,22.606 20.669,20.479 U8.7
  Bottom w0.203: v1(18.923,26.162) 18.923,27.432 20.701,29.21 20.701,30.099 20.193,30.607 v1(20.193,33.782)
NetJ2_2: J2.2 R1.2 R2.2 | length 6.2
  Top w0.203: R1.2@24.892,52.705 R1.2
  Top w0.381: J2.2 24.13,57.023 25.044,56.109 25.044,55.245 R1.2
NetJ4_4: J4.4 Q3.3 | length 15.2
  Top w0.508: Q3.3 46.304,32.004 48.082,33.782 53.619,33.782 58.547,28.854 J4.4
NetJ4_5: J4.5 Q4.3 | length 6.5
  Top w0.508: Q4.3 54.432,30.861 58.353,26.941 58.353,26.483 J4.5
NetJ4_6: J4.6 Q5.3 | length 13.6
  Top w0.508: Q5.3 47.466,27.401 47.669,27.604 47.669,27.782 48.208,28.321 53.975,28.321 J4.6
NetJ4_7: J4.7 Q6.3 | length 6.1
  Top w0.508: Q6.3 54.432,25.4 58.547,21.285 J4.7
NetJ4_8: J4.8 Q7.3 | length 5.5
  Top w0.508: Q7.3 54.305,21.209 56.845,18.669 J4.8
NetJ4_10: J4.10 Q8.3 | length 15.6
  Top w0.508: Q8.3 46.152,20.785 48.522,18.415 53.721,18.415 J4.10
NetJ5_1: J5.1 U8.3 | length 32.8
  Top w0.203: v1(-2.413,19.939) -1.016,19.939 1.524,22.479 10.922,22.479 v1(12.319,23.876) ; v1(16.129,23.876) 17.469,22.536 U8.3
  Bottom w0.203: J5.1 -8.382,19.939 v1(-2.413,19.939) ; v1(12.319,23.876) v1(16.129,23.876)
NetJ5_4: J5.4 U8.21 | length 34.3
  Top w0.203: J5.4 -9.652,28.702 -9.525,28.702 -8.118,27.295 -8.118,26.213 -6.858,24.953 -3.744,24.953 -3.378,24.587 -2.083,24.587 1.27,27.94 11.624,27.94 14.037,30.353 16.84,30.353 18.269,28.924 U8.21
NetJ9_1: J9.1 J11.1 PS1.ACL PS1B.ASN | length 25.6
  Bottom w1.524: PS1B.ASN 10.131,-5.461 19.939,-5.461 22.098,-3.302 J9.1 21.122,-0.802 J11.1 ; PS1.ACL J11.1@20.874,2.752
NetJ9_4: J9.4 J11.4 PS1.ACN PS1B.ACL | length 26.4
  Bottom w1.524: PS1.ACN 28.67,2.752 J11.4 28.622,-1.082 28.098,-1.606 J9.4 28.582,-2.262 28.582,-4.318 29.217,-4.953 37.719,-4.953 38.146,-5.38 40.018,-5.38 PS1B.ACL ; PS1B.ACL@39.892,-5.701 PS1B.ACL@39.906,-5.715
NetQ1_3: Q1.3 R2.1 | length 4.9
  Top w0.381: Q1.3 20.904,58.42 21.171,58.153 21.171,57.842 23.47,55.543 R2.1
NetQ2_3: Q2.3 R1.1 | length 2.6
  Top w0.381: Q2.3 21.666,53.848 21.933,53.581 21.933,53.404 22.631,52.705 R1.1
NetQ3_2: Q3.2 R3.2 | length 2.3
  Top w0.508: R3.2 44.094,30.904 Q3.2
NetQ4_2: Q4.2 R4.2 | length 2.3
  Top w0.508: R4.2 52.222,29.761 Q4.2
NetQ5_2: Q5.2 R5.2 | length 2.2
  Top w0.508: R5.2 Q5.2@45.256,26.417
NetQ6_2: Q6.2 R6.2 | length 2.2
  Top w0.508: R6.2 Q6.2@52.222,24.3
NetQ7_2: Q7.2 R7.2 | length 2.1
  Top w0.508: R7.2@49.935,20.233 Q7.2@52.072,20.233
NetQ8_2: Q8.2 R8.2 | length 2.2
  Top w0.508: R8.2 43.581,20.193 Q8.2
NetR13_2: R13.2 R14.1 U1.1 | length 14.2
  Top w0.203: U1.1 14.237,41.364 14.643,41.364 15.113,40.894 15.113,37.592 16.383,36.322 19.71,36.322 20.98,37.592 R14.1 R13.2
NetR15_2: R15.2 R16.1 U4.1 | length 9.5
  Top w0.203: v2(33.782,40.767) 33.782,40.918 33.553,41.147 R16.1 R15.2
  Top w0.61: U4.1 29.515,44.662 29.527,44.675 30.324,44.675 v2(30.353,44.704)
  Bottom w0.4: v2(30.353,44.704) 30.46,44.597 30.46,44.089 v2(33.782,40.767)
NetSW2_1: SW2.1 U8.24 | length 31.5
  Top w0.203: v1(13.843,27.686) 15.869,27.686 U8.24
  Bottom w0.203: SW2.1 -4.343,11.024 0.254,15.621 0.254,19.304 6.858,25.908 12.065,25.908 v1(13.843,27.686)
NetSW2_2: SW2.2 U8.23 | length 33.8
  Top w0.203: v1(4.953,26.416) 5.334,26.797 11.938,26.797 14.478,29.337 16.415,29.337 16.669,29.083 U8.23
  Bottom w0.203: SW2.2 -2.692,13.564 -0.254,16.002 -0.254,19.685 4.953,24.892 v1(4.953,26.416)
NetSW2_3: SW2.3 U8.29 | length 23.8
  Top w0.203: SW2.3 -4.216,16.104 1.651,21.971 11.176,21.971 12.3,23.095 12.827,23.095 13.081,23.349 U8.29
NetSW2_4: SW2.4 U8.30 | length 24.8
  Top w0.203: v1(-3.048,16.129) -0.635,18.542 -0.635,19.05 1.75,21.435 11.528,21.435 12.643,22.549 U8.30
  Bottom w0.203: SW2.4 -3.835,16.129 v1(-3.048,16.129)
NetSW2_5: SW2.5 U8.31 | length 32.4
  Top w0.203: SW2.5 -7.874,19.66 -7.874,15.748 -6.985,14.859 -2.794,14.859 0.254,17.907 0.254,19.177 2.032,20.955 11.811,20.955 12.605,21.749 U8.31
NetSW2_6: SW2.6 U8.2 | length 28
  Top w0.203: v1(0.127,22.098) 1.016,22.987 10.287,22.987 v1(10.922,23.622) ; v1(14.605,19.177) 15.443,18.339 16.358,18.339 16.669,18.65 U8.2
  Bottom w0.203: SW2.6 -3.658,23.724 -2.413,22.479 -0.889,22.479 -0.508,22.098 v1(0.127,22.098) ; v1(10.922,23.622) 14.605,19.939 v1(14.605,19.177)
NetSW2_7: SW2.7 U8.25 | length 25.6
  Top w0.203: SW2.7 -3.658,26.264 v1(-2.667,25.273) ; v1(0.127,23.241) 0.127,25.019 1.778,26.67 3.556,26.67 4.572,25.654 5.715,25.654 6.35,26.289 12.446,26.289 12.706,26.549 U8.25
  Bottom w0.203: v1(-2.667,25.273) -1.397,25.273 0.127,23.749 v1(0.127,23.241)
NetSW2_8: SW2.8 U8.26 | length 24.9
  Top w0.203: SW2.8 -4.445,26.899 -3.023,26.899 -2.187,26.063 -1.679,26.063 v1(-1.651,26.035) ; v1(1.016,24.003) 1.016,24.892 2.254,26.13 3.334,26.13 4.318,25.146 5.969,25.146 6.572,25.749 U8.26
  Bottom w0.203: v1(-1.651,26.035) -1.016,26.035 v1(1.016,24.003)
NetSW2_9: SW2.9 U8.27 | length 24
  Top w0.203: SW2.9 -2.946,27.94 v1(-1.651,27.94) ; v1(2.921,25.4) 3.683,24.638 9.906,24.638 10.541,25.273 12.884,25.273 13.208,24.949 U8.27
  Bottom w0.203: v1(-1.651,27.94) 0.381,27.94 v1(2.921,25.4)
NetSW2_10: SW2.10 U8.28 | length 29
  Top w0.203: SW2.10 -7.747,32.487 -7.747,30.861 -6.985,30.099 -5.969,30.099 -3.291,27.421 -2.275,27.421 -1.905,27.051 v1(-0.889,27.051) ; v1(2.032,24.638) 2.54,24.13 10.16,24.13 10.668,24.638 12.719,24.638 13.208,24.149 U8.28
  Bottom w0.203: v1(-0.889,27.051) 0.127,26.035 0.635,26.035 v1(2.032,24.638)
PWM0: Q3.1 U8.16 | length 26.5
  Top w0.203: U8.16 27.565,26.549 29.972,28.956 38.405,28.956 40.056,30.607 40.056,33.147 41.199,34.29 42.761,34.29 Q3.1
PWM1: Q4.1 U8.15 | length 32.7
  Top w0.203: U8.15 28.067,25.749 30.639,28.321 40.513,28.321 42.164,29.972 46.414,29.972 49.208,32.766 51.27,32.766 Q4.1
PWM2: Q5.1 U8.14 | length 23.8
  Top w0.203: U8.14 28.505,24.949 31.115,27.559 44.462,27.559 Q5.1
PWM3: Q6.1 U8.13 | length 33.6
  Top w0.203: U8.13 28.829,24.149 30.988,26.308 38.716,26.308 40.875,24.149 46.374,24.149 48.387,26.162 48.387,27.051 48.895,27.559 51.016,27.559 Q6.1
PWM4: Q7.1 U8.12 | length 31.4
  Top w0.203: U8.12 29.318,23.349 31.369,25.4 38.335,25.4 40.386,23.349 47.8,23.349 48.035,23.114 51.143,23.114 Q7.1
PWM5: Q8.1 U8.11 | length 23
  Top w0.203: U8.11 29.845,22.549 31.807,24.511 38.043,24.511 40.005,22.549 43.13,22.549 Q8.1
STATUS: D2.1 J13.4 | length 10.7
  Top w0.203: D2.1@-7.933,39.057 D2.1 ; D2.1@-7.366,39.56 -7.302,39.56 -4.953,37.211 -4.953,35.052 J13.4
TEMPERATURE: J4.9 R9.1 | length 23.5
  Top w0.203: R9.1 36.576,19.901 38.443,18.034 45.193,18.034 45.701,17.526 52.451,17.526 v1(53.721,16.256)
  Bottom w0.203: v1(53.721,16.256) 53.785,16.192 58.483,16.192 J4.9
pads on no net: J1.3 J1.4 J9.2 J9.3 J11.2 J11.3 J11.5 J23.2 J23.5 U8.5 U8.9

## Polygon pours and split planes (outlines as drawn)
GND_POWER.GLOBAL on Bottom "Bottom-GND_POWER.GLOBAL" (solid, remove dead copper, pour order 0): 55.449,8.102 61.621,8.458 61.798,8.475 61.798,41.096 61.6,41.1 55.449,41.503 55.449,50.139 43.434,60.655 40.615,60.655 34.671,63.347 15.494,63.347 10.033,60.629 6.731,60.629 -5.029,50.977 -5.029,42.011 -8.407,42.011 -12.395,31.47 -12.395,18.599 -8.613,8.178 -5.054,8.178 -5.054,-0.94 4.953,-6.706 45.441,-6.706 55.449,-0.94
GND_POWER.GLOBAL on Top "Top-GND_POWER.GLOBAL" (solid, remove dead copper, pour order 1): 55.449,8.102 61.621,8.458 61.773,8.473 61.773,41.097 61.6,41.1 55.449,41.503 55.449,50.139 43.434,60.655 40.615,60.655 34.671,63.347 15.494,63.347 10.033,60.629 6.731,60.629 -5.029,50.977 -5.029,42.011 -8.474,42.011 -12.395,31.646 -12.395,18.596 -8.614,8.178 -5.054,8.178 -5.054,-0.94 4.953,-6.706 45.441,-6.706 55.449,-0.94

## Keep-outs
Keep-Out Layer:
  lines w0.025: -11.583,31.927 cw(c23.315,25.648) -8.39,41.525 ; -11.582,18.063 -11.582,31.931 ; -11.58,18.052 ccw(c24.43,24.792) -8.385,8.502 ; -8.395,8.522 -5.931,8.522 cw(c-5.923,7.589) -4.991,7.581 -4.991,2.934 ccw(c19.082,20.247) -3.035,0.496 -1.765,1.765 cw(c0,0) 1.765,-1.765 0.492,-3.038 ; -8.395,41.516 -5.626,41.516 ; -5.627,41.516 ccw(c-5.629,42.154) -4.991,42.151 -4.991,47.104 -3.023,49.505 -1.765,48.235 ccw(c0,50) 1.765,51.765 0.484,53.046 cw(c24.926,25.21) 15.456,61.024 34.506,61.023 cw(c25.029,25.062) 49.137,53.379 ; -1.124,6.794 ccw(c0.024,6.862) -0.948,6.247 ; -1.124,6.795 -1.124,11.829 cw(c-0.162,11.82) -0.847,12.495 0.889,14.224 0.889,18.458 cw(c2.007,18.384) 1.164,19.122 2.062,20.019 cw(c2.719,19.451) 2.727,20.32 ; -0.946,6.245 ccw(c23.627,23.838) -0.123,5.148 ; -0.117,5.14 ccw(c0.7,5.902) 0.694,4.785 ; 0.491,-3.038 ccw(c24.726,24.655) 5.938,-6.987 ; 0.694,4.785 cw(c0.99,1.016) 4.76,0.719 ; 1.137,31.115 1.137,44.365 cw(c1.959,44.458) 1.86,45.28 ; 1.137,31.115 ccw(c2.797,31.124) 2.788,29.464 ; 1.858,45.279 ccw(c0.98,48.996) 4.787,49.302 ; 2.726,20.32 10.465,20.32 ; 2.787,29.464 4.445,29.464 ccw(c4.436,31.124) 6.096,31.115 ; 4.76,0.719 ccw(c5.922,0.744) 5.113,-0.091 ; 4.786,49.305 cw(c5.846,49.328) 5.14,50.118 ; 5.109,-0.088 ccw(c25.18,25.235) 9.564,-3.053 ; 5.147,50.124 cw(c25.183,24.845) 10.389,53.508 ; 5.956,-6.998 44.056,-6.998 ; 6.096,31.115 6.096,35.433 cw(c7.756,35.424) 7.747,37.084 ; 7.537,37.084 10.592,37.084 ccw(c10.589,37.893) 11.398,37.89 ; 9.585,-3.065 ccw(c10.001,-2.385) 10.038,-3.181 12.008,-3.181 ccw(c12,-2.233) 12.948,-2.242 12.948,3.499 13.887,4.439 36.112,4.439 37.052,3.499 37.052,-2.75 ccw(c37.992,-2.75) 37.992,-3.689 38.99,-3.689 ; 10.374,53.5 cw(c10.696,52.876) 11.398,52.876 11.398,37.719 ; 10.464,20.32 cw(c10.444,19.36) 11.405,19.355 11.405,16.281 12.7,14.986 22.987,14.986 24.39,16.389 50.667,16.389 54.154,12.904 cw(c53.485,12.239) 54.117,11.54 ; 38.602,37.998 38.602,52.731 cw(c39.371,52.731) 39.726,53.414 ; 38.602,37.999 ccw(c39.296,38.007) 39.293,37.313 53.33,37.313 ccw(c53.26,38.111) 54.009,38.399 ; 38.992,-3.689 ccw(c38.94,-2.537) 39.413,-3.589 ; 39.384,-3.603 ccw(c25.49,24.143) 42.752,-1.643 ; 39.724,53.415 cw(c24.591,24.378) 44.84,50.11 ; 42.762,-1.637 ccw(c38.922,4.728) 46.288,3.725 54.11,11.547 ; 44.047,-7.003 ccw(c24.763,25.218) 49.126,-3.357 ; 44.831,50.117 cw(c44.301,49.398) 45.189,49.304 ; 45.188,49.302 ccw(c48.978,49.003) 49.283,45.214 ; 49.125,-3.356 49.58,-3.81 50.927,-3.81 53.373,-1.364 53.373,0.882 ; 49.125,-3.355 47.882,-2.112 cw(c50.003,0.01) 52.124,2.131 53.373,0.882 ; 49.135,53.38 49.176,53.34 50.165,53.34 53.379,50.126 53.379,49.137 cw(c25.332,25.329) 55.019,47.057 ; 49.138,53.38 47.877,52.119 ccw(c49.998,49.998) 52.119,47.877 53.379,49.136 ; 49.28,45.214 cw(c49.28,44.254) 50.093,44.764 ; 50.101,44.754 cw(c23.94,24.29) 54.018,38.379 ; 55.004,2.959 55.004,7.582 cw(c55.945,7.58) 55.943,8.522 58.382,8.522 ; 55.004,42.456 55.004,47.079 ; 55.004,42.457 ccw(c55.952,42.465) 55.942,41.516 ; 55.018,2.98 cw(c29.201,21.531) 53.373,0.882 ; 55.944,41.516 58.382,41.516 ; 58.382,41.515 cw(c25.739,25.24) 61.005,34.557 ; 58.408,8.574 ccw(c26.269,24.598) 61.006,15.485 ; 60.998,15.456 60.998,34.582 ; 54.117,11.54 54.117,11.54 ; 54.117,11.54 54.117,11.54

## Other copper
Top:
  pour cut-out: -7.366,4.953 -7.366,1.397 3.81,-9.779 51.181,-9.779 58.039,-2.921 57.658,-2.54 57.658,4.953
Bottom:
  pour cut-out: -6.871,5.575 -6.871,0.902 3.696,-9.665 51.168,-9.665 58.534,-2.299 58.153,-1.918 58.153,5.575

## Silkscreen, mask and mechanical layers (free items; w line width, h text height)
Silkscreen Top:
  lines w0.127: 30.861,-6.35 30.861,-2.667 37.084,-2.667 37.084,-6.35 30.861,-6.35
  text "GND" at -3.962,47.015 h0.89
  text "CUTOUT" at 41.529,42.037 h1.02
  text "CUTOUT" at 3.302,38.735 h1.02
  text "CUTOUT" at 20.701,8.331 h1.02
  text "REV" at 32.131,-2.413 h0.89
  text "LUX_35A" at 11.938,-5.715 h1.27
Silkscreen Bottom:
  circle w0.635: c20.549,32.893 r4.504
  circle w0.127: c33.556,39.361 r0.183
  circle w0.127: c34.187,44.079 r0.211
  circle w0.127: c33.556,39.361 r0.472
  region: 29.134,37.973 35.23,37.973 35.23,36.703 29.134,36.703 29.134,37.973
  region: 31.801,42.799 33.172,42.799 33.172,42.469 31.801,42.469 31.801,42.799
  region: 33.503,39.421 33.63,39.421 33.63,39.294 33.503,39.294 33.503,39.421
  lines w0.127: 29.258,38.738 35.036,44.517 ; 29.266,44.456 35.045,38.677 ; 30.347,43.942 30.658,43.942 ; 30.594,43.942 cw(c31.249,43.833) 31.161,44.491 33.127,44.491 ; 33.118,39.178 31.097,39.178 30.658,43.942 ; 33.126,44.491 cw(c33.126,43.276) 33.976,44.144 ; 33.602,39.809 33.94,43.942 ; 34.023,43.942 30.658,43.942 ; 29.134,36.665 29.134,37.973 35.26,37.973 35.26,36.665 29.134,36.665 ; 31.024,43.96 31.024,44.536 31.298,44.536 31.298,43.96 31.024,43.96 ; 31.133,38.821 31.133,39.178 31.462,39.178 31.462,38.821 31.133,38.821 ; 31.801,42.424 31.801,42.799 33.172,42.799 33.172,42.424 31.801,42.424 ; 32.002,44.317 32.002,44.637 32.88,44.637 32.88,44.317 32.002,44.317 ; 33.858,42.9 33.858,43.421 34.398,43.421 34.398,42.9 33.858,42.9
  lines w0.635: 17.628,29.972 23.597,35.941
  text "-V" at 31.396,54.202 h0.8
  text "+V" at 41.175,54.202 h0.8
  text "Pb" at 22.327,31.242 h2.86
Layer_10:
  circle w0.1: c0,0 r1.4
  circle w0.1: c0,50 r1.4
  circle w0.025: c50.013,50.012 r1.905
  circle w0.025: c50.013,0 r1.905
  lines w0.025: 0,0 50.013,50.013 ; 0,50.013 50.013,0
Drill Drawing:
  text "CUTOUT" at 41.529,42.037 h1.02
  text "CUTOUT" at 3.302,38.735 h1.02
  text "CUTOUT" at 20.701,8.331 h1.02